# Altium PCB LKS_Motor_0313.PcbDoc (part 3 of 4)
Units mil, origin at the board's own origin, x right, y up, seen from the top; angles counter-clockwise.
Board outline 4321.51 x 591.52 mil, 2 copper layers (Top Layer, Bottom Layer); 107 components, 73 nets, 326 pads, 213 vias.
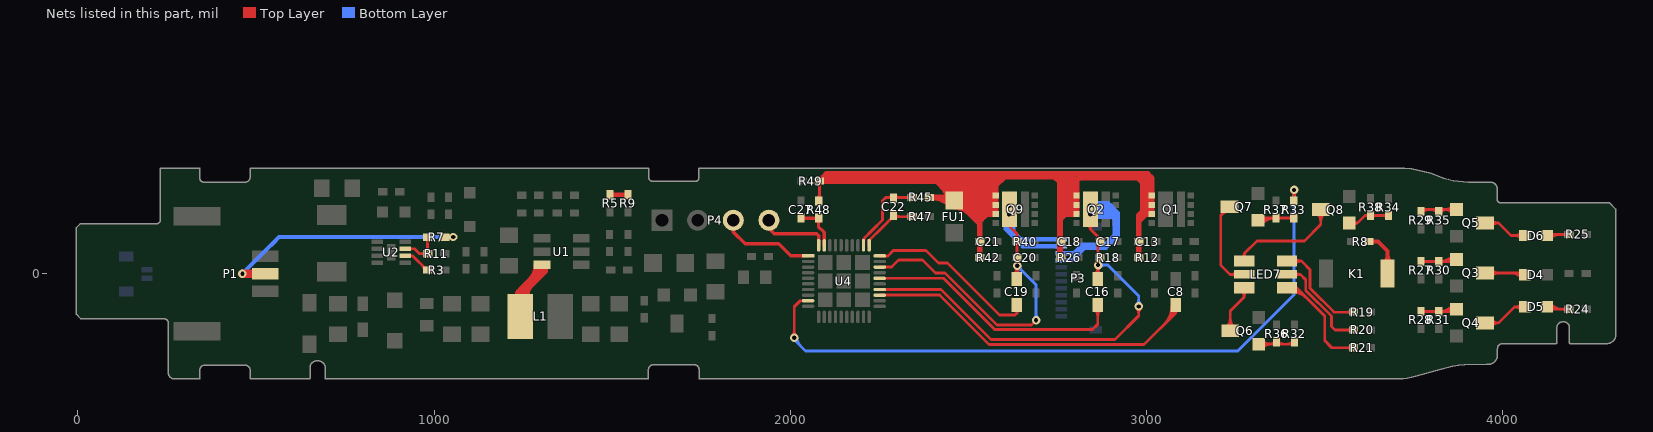
[diagram p3: the nets of this part, all layers, seen from the top]

## Via types
v1: diameter 25, hole 15, Top Layer to Bottom Layer, tented both sides, 139 vias
v2: diameter 23.62, hole 11.81, Top Layer to Bottom Layer, 74 vias

## Nets (pads, with @x,y where several pads share a name; then routed paths per layer and width w, separated by ;. In a path a pad name is that pad's centre, name@x,y a point inside that pad or via, vN(x,y) a via of type N, cw(c..) or ccw(c..) an arc to the next point about the centre after c; other vN are vias at no path point) (continued)
NetD4_2: D4.2 Q3.3 | length 352.4
  Top Layer w7.87: Q3.3@3950,2 4056.39,2 D4.2@4061.53,-3.13 ; 3990.95,2 ccw(c3990.95,-31.95) 3966.94,-7.94 cw(c3990.95,-31.95) 3990.95,2 ; 3990.95,2 cw(c3990.95,35.95) 3966.94,11.94 ccw(c3990.95,35.95) 3990.95,2 ; 4020.61,2 cw(c4020.61,-44.05) 4053.17,-11.49 ccw(c4020.61,-44.05) 4020.61,2 ; 4039.62,2 cw(c4039.62,-25.04) 4058.74,-5.92 ccw(c4039.62,-25.04) 4039.62,2 ; 4045.41,2 ccw(c4045.41,12.98) 4053.17,5.22 cw(c4045.41,12.98) 4045.41,2
NetD5_1: D5.1 R24.1 | length 236.6
  Top Layer w7.87: D5.1@4131.61,-100 R24.1@4186,-100 ; 4168.36,-100 ccw(c4168.36,-85.36) 4178.71,-95.71 cw(c4168.36,-85.36) 4168.36,-100 ; 4168.36,-100 cw(c4168.36,-114.64) 4178.71,-104.29 ccw(c4168.36,-114.64) 4168.36,-100 ; D5.1@4127.26,-90.08 ccw(c4151.2,-66.14) 4151.2,-100 cw(c4151.2,-66.14) D5.1@4127.26,-90.08 ; D5.1@4132.83,-84.51 ccw(c4170.21,-47.13) 4170.21,-100 cw(c4170.21,-47.13) D5.1@4132.83,-84.51
NetD5_2: D5.2 Q4.3 | length 312.1
  Top Layer w7.87: Q4.3@3950,-138 3988,-138 ; D5.2@4061.53,-93.13 4032.86,-93.13 3988,-138 ; 3988,-138 ccw(c3988,-165.13) 3967.58,-147.26 cw(c3988,-165.13) 3988,-138 ; 3988,-138 cw(c3988,-110.87) 3967.58,-128.74 ccw(c3988,-110.87) 3988,-138 ; 4033.01,-93.13 ccw(c4033.01,-64.62) 4053.17,-84.78 cw(c4033.01,-64.62) 4033.01,-93.13 ; 4033.01,-93.14 cw(c4033.01,-121.65) 4053.17,-101.49 ccw(c4033.01,-121.65) 4033.01,-93.14
NetD6_1: D6.1 R25.1 | length 228.6
  Top Layer w7.87: D6.1@4124.47,107.13 4127.34,110 R25.1@4186,110 ; 4168.36,110 ccw(c4168.36,124.64) 4178.71,114.29 cw(c4168.36,124.64) 4168.36,110 ; 4168.36,110 cw(c4168.36,95.36) 4178.71,105.71 ccw(c4168.36,95.36) 4168.36,110 ; D6.1@4127.26,104.35 cw(c4140.9,90.71) 4140.9,110 ccw(c4140.9,90.71) D6.1@4127.26,104.35 ; D6.1@4132.83,98.78 cw(c4159.91,71.7) 4159.91,110 ccw(c4159.91,71.7) D6.1@4132.83,98.78 ; D6.1@4132.83,115.49 ccw(c4146.07,128.73) 4146.07,110 cw(c4146.07,128.73) D6.1@4132.83,115.49
NetD6_2: D6.2 Q5.3 | length 308.1
  Top Layer w7.87: Q5.3@3950,142 3988,142 ; D6.2@4061.53,106.87 4023.14,106.87 3988,142 ; 3988,142 ccw(c3988,114.87) 3967.58,132.74 cw(c3988,114.87) 3988,142 ; 3988,142 cw(c3988,169.13) 3967.58,151.26 ccw(c3988,169.13) 3988,142 ; 4033.01,106.87 ccw(c4033.01,135.38) 4053.17,115.22 cw(c4033.01,135.38) 4033.01,106.87 ; 4033.01,106.86 cw(c4033.01,78.35) 4053.17,98.51 ccw(c4033.01,78.35) 4033.01,106.86
NetK1_1: K1.1 R8.1 | length 231.5
  Top Layer w11.81: R8.1@3624,90 3650,90 3676.61,63.39 K1.1@3676.61,0 ; 3676.61,52.95 ccw(c3709.88,52.95) 3686.36,29.43 cw(c3709.88,52.95) 3676.61,52.95 ; 3676.61,52.95 cw(c3643.35,52.95) 3666.87,29.43 ccw(c3643.35,52.95) 3676.61,52.95
NetL1_1: L1.1 U1.6 | length 1844.4
  Top Layer w11.81: 1256,-54 1256,-52 1272,-36 ; L1.1@1263,-88.78 1263,-35 ; U1.6@1294,25.72 1294,9 ; U1.6@1302.88,24.6 1302.88,4.88 1294,-4 ; U1.6@1314,23.48 1314,6 1272,-36 ; 1234,-51 ccw(c1245.7,-51) 1244.6,-62.65 cw(c1245.7,-51) 1234,-51 ; 1234,-51 cw(c1214.1,-51) 1225.14,-67.56 ccw(c1214.1,-51) 1234,-51 ; 1234,-51 1234,-112.22 L1.1@1241.78,-120 1256,-105.78 1256,-42 ; 1234,-51 1250.5,-34.5 ; 1241.78,-56.22 ccw(c1248.74,-56.22) 1247.43,-63.06 cw(c1248.74,-56.22) 1241.78,-56.22 ; 1241.78,-56.22 cw(c1234.82,-56.22) 1236.13,-63.06 ccw(c1234.82,-56.22) 1241.78,-56.22 ; 1241.78,-56.22 1256,-42 ; 1241.78,-56.22 1241.78,-110 1241.78,-43.22 ; 1241.78,-43.22 ccw(c1267.28,-43.22) 1255.57,-65.87 cw(c1267.28,-43.22) 1241.78,-43.22 ; 1241.78,-43.22 cw(c1216.28,-43.22) 1227.99,-65.87 ccw(c1216.28,-43.22) 1241.78,-43.22 ; 1241.78,-43.22 1250.5,-34.5 ; 1250.5,-34.5 1294,9 ; 1256,-54.42 ccw(c1279.88,-54.42) L1.1@1262.99,-71.31 ; 1256,-54.42 ccw(c1279.88,-54.42) L1.1@1262.99,-71.31 ; 1256,-54.42 ccw(c1279.88,-54.42) L1.1@1262.99,-71.31 ; 1256,-54.42 ccw(c1279.88,-54.42) L1.1@1262.99,-71.31 ; 1256,-54.42 ccw(c1279.88,-54.42) L1.1@1262.99,-71.31 ; 1256,-54.42 ccw(c1279.88,-54.42) L1.1@1262.99,-71.31 ; 1256,-42 cw(c1235.03,-42) 1237.81,-62.78 ccw(c1235.03,-42) 1256,-42 ; 1256,-42 1263,-35 ; 1263,-35 cw(c1235.1,-35) 1238.32,-62.72 ccw(c1235.1,-35) 1263,-35 ; 1263,-35 1272,-26 ; 1272,-36 ccw(c1295.33,-59.34) 1267.28,-76.72 cw(c1295.33,-59.34) 1272,-36 ; 1272,-36 1272,-26 ; 1272,-26 1294,-4 ; U1.6@1287.96,19.58 cw(c1281.23,8.73) 1294,8.73 ; U1.6@1287.96,19.58 cw(c1281.23,8.73) 1294,8.73 ; U1.6@1287.96,19.58 cw(c1281.23,8.73) 1294,8.73 ; U1.6@1287.96,19.58 cw(c1281.23,8.73) 1294,8.73 ; 1294,-4 1294,9 ; 1302.88,10.34 ccw(c1288.62,10.34) 1298.71,20.42 cw(c1288.62,10.34) 1302.88,10.34 ; 1302.88,10.34 cw(c1317.14,10.34) 1307.06,20.42 ccw(c1317.14,10.34) 1302.88,10.34 ; L1.1@1239.37,-74.49 ccw(c1236.84,-55.49) 1256,-55.49 cw(c1236.84,-55.49) L1.1@1239.37,-74.49 ; L1.1@1239.68,-74.45 ccw(c1236.64,-48.27) 1263,-48.27 cw(c1236.64,-48.27) L1.1@1239.68,-74.45 ; L1.1@1241.04,-86.18 ccw(c1238.18,-61.53) 1263,-61.53 cw(c1238.18,-61.53) L1.1@1241.04,-86.18 ; L1.1@1257.24,-82.94 cw(c1282.32,-67.4) 1261.46,-46.54 ccw(c1282.32,-67.4) L1.1@1257.24,-82.94 ; 1267.89,-17.11 ccw(c1226.18,24.6) 1285.17,24.6 cw(c1226.18,24.6) 1267.89,-17.11 ; U1.6@1286.9,20.42 cw(c1269.74,3.27) 1294,3.27 ccw(c1269.74,3.27) U1.6@1286.9,20.42 ; 1288.05,3.05 ccw(c1266.5,24.6) 1296.98,24.6 cw(c1266.5,24.6) 1288.05,3.05 ; U1.6@1310.52,20.42 cw(c1302.11,12.01) 1314,12.01 ccw(c1302.11,12.01) U1.6@1310.52,20.42 ; 1314,8.67 cw(c1330.62,8.67) 1318.87,20.42 ccw(c1330.62,8.67) 1314,8.67
NetLED7_1: LED7.1 Q8.3 | length 468.3
  Top Layer w7.87: LED7.1@3273.96,35.4 3273.96,55.96 ; Q8.3@3489,180 3489,138 3443,92 3310,92 3273.96,55.96 ; 3273.96,55.96 ccw(c3285.95,55.96) 3279.91,45.6 cw(c3285.95,55.96) 3273.96,55.96 ; 3273.96,55.96 cw(c3261.97,55.96) 3268.01,45.6 ccw(c3261.97,55.96) 3273.96,55.96 ; 3489,146.05 ccw(c3455.05,146.05) 3479.06,170.06 cw(c3455.05,146.05) 3489,146.05 ; 3489,146.05 cw(c3522.95,146.05) 3498.94,170.06 ccw(c3522.95,146.05) 3489,146.05
NetLED7_2: LED7.2 Q7.3 | length 369.6
  Top Layer w7.87: Q7.3@3233,188 3208,163 3208,24 3234,-2 LED7.2@3273.96,-2 ; 3238.22,-2 ccw(c3238.22,17.01) 3251.66,3.57 cw(c3238.22,17.01) 3238.22,-2 ; 3238.22,-2 cw(c3238.22,-21.01) 3251.66,-7.57 ccw(c3238.22,-21.01) 3238.22,-2 ; 3211.5,166.5 ccw(c3202.67,175.33) 3213.64,181.29 cw(c3202.67,175.33) 3211.5,166.5 ; 3213.94,168.94 cw(c3226,156.89) 3226,173.94 ccw(c3226,156.89) 3213.94,168.94
NetLED7_3: LED7.3 Q6.3 | length 324
  Top Layer w7.87: Q6.3@3235,-160 3235,-105 3273.96,-66.04 LED7.3@3273.96,-39.4 ; 3235,-126.05 ccw(c3268.95,-126.05) 3244.94,-150.06 cw(c3268.95,-126.05) 3235,-126.05 ; 3235,-126.05 cw(c3201.05,-126.05) 3225.06,-150.06 ccw(c3201.05,-126.05) 3235,-126.05 ; 3273.96,-66.04 ccw(c3249.83,-66.04) 3266.03,-48.15 cw(c3249.83,-66.04) 3273.96,-66.04 ; 3273.96,-66.04 cw(c3298.09,-66.04) 3281.89,-48.15 ccw(c3298.09,-66.04) 3273.96,-66.04
NetLED7_4: LED7.4 R21.1 | length 542.2
  Top Layer w7.87: LED7.4@3394.04,-39.4 3420.4,-39.4 3500,-119 3500,-188 3520,-208 R21.1@3580.87,-208 ; 3563.24,-208 ccw(c3563.24,-193.36) 3573.59,-203.71 cw(c3563.24,-193.36) 3563.24,-208 ; 3563.24,-208 cw(c3563.24,-222.64) 3573.59,-212.29 ccw(c3563.24,-222.64) 3563.24,-208 ; LED7.4@3406.84,-51.21 cw(c3406.84,-112.47) 3450.15,-69.15 ccw(c3406.84,-112.47) LED7.4@3406.84,-51.21 ; LED7.4@3406.84,-43.34 cw(c3406.84,-85.59) 3436.71,-55.71 ccw(c3406.84,-85.59) LED7.4@3406.84,-43.34 ; LED7.4@3406.84,-35.46 cw(c3406.84,-58.71) 3423.27,-42.27 ccw(c3406.84,-58.71) LED7.4@3406.84,-35.46
NetLED7_5: LED7.5 R20.1 | length 391.7
  Top Layer w7.87: LED7.5@3394.04,-2 3432,-2 3447,-17 3447,-47 3519,-119 3519,-148 3529,-158 R20.1@3580.87,-158 ; 3429.78,-2 ccw(c3429.78,-21.01) 3416.34,-7.57 cw(c3429.78,-21.01) 3429.78,-2 ; 3429.78,-2 cw(c3429.78,17.01) 3416.34,3.57 ccw(c3429.78,17.01) 3429.78,-2 ; 3563.24,-158 ccw(c3563.24,-143.36) 3573.59,-153.71 cw(c3563.24,-143.36) 3563.24,-158 ; 3563.24,-158 cw(c3563.24,-172.64) 3573.59,-162.29 ccw(c3563.24,-172.64) 3563.24,-158
NetLED7_6: LED7.6 R19.1 | length 408.7
  Top Layer w7.87: LED7.6@3394.04,35.4 3434.6,35.4 ; R19.1@3580.87,-108 3526,-108 3459,-41 3459,11 3434.6,35.4 ; 3434.6,35.4 ccw(c3434.6,8.68) 3415.34,27.21 cw(c3434.6,8.68) 3434.6,35.4 ; 3434.6,35.4 cw(c3434.6,62.12) 3415.34,43.59 ccw(c3434.6,62.12) 3434.6,35.4 ; 3563.24,-108 ccw(c3563.24,-93.36) 3573.59,-103.71 cw(c3563.24,-93.36) 3563.24,-108 ; 3563.24,-108 cw(c3563.24,-122.64) 3573.59,-112.29 ccw(c3563.24,-122.64) 3563.24,-108
NetP1_2: P1.2 R7.1 | length 900.1
  Top Layer w11.81: R7.1@1030,103 v2(1054,103) ; R7.1@1039.74,103 ccw(c1039.74,117.26) 1049.82,107.18 cw(c1039.74,117.26) R7.1@1039.74,103 ; R7.1@1039.74,103 cw(c1039.74,88.74) 1049.82,98.82 ccw(c1039.74,88.74) R7.1@1039.74,103 ; R7.1@1035.9,99.23 cw(c1044.99,90.13) 1044.99,103 ccw(c1044.99,90.13) R7.1@1035.9,99.23
  Top Layer w23.62: v2(462,-0.01) P1.2@525.97,-0.01
  Bottom Layer w11.81: v2(462,-0.01) 554,91.99 548.44,86.43 ; 543.36,81.35 565.01,103 v2(1054,103) ; 472.09,10.08 ccw(c482.17,-0.01) 467.91,-0.01 cw(c482.17,-0.01) 472.09,10.08 ; 472.09,10.08 cw(c462,20.16) 462,5.9 ccw(c462,20.16) 472.09,10.08 ; 1039.74,103 ccw(c1039.74,117.26) 1049.82,107.18 cw(c1039.74,117.26) 1039.74,103 ; 1039.74,103 cw(c1039.74,88.74) 1049.82,98.82 ccw(c1039.74,88.74) 1039.74,103
NetQ3_1: Q3.1 R27.1 R30.1 | length 402.7
  Top Layer w7.87: R27.1@3770,34 3864,34 Q3.1@3870,40 ; 3784.64,34 ccw(c3784.64,19.36) 3774.29,29.71 cw(c3784.64,19.36) 3784.64,34 ; 3784.64,34 cw(c3784.64,48.64) 3774.29,38.29 ccw(c3784.64,48.64) 3784.64,34 ; 3805.36,34 ccw(c3805.36,48.64) 3815.71,38.29 cw(c3805.36,48.64) 3805.36,34 ; 3805.36,34 cw(c3805.36,19.36) 3815.71,29.71 ccw(c3805.36,19.36) 3805.36,34 ; 3834.64,34 ccw(c3834.64,19.36) 3824.29,29.71 cw(c3834.64,19.36) 3834.64,34 ; 3834.64,34 cw(c3834.64,48.64) 3824.29,38.29 ccw(c3834.64,48.64) 3834.64,34 ; R30.1@3821.56,34 ccw(c3821.56,88.44) 3860.06,49.94 cw(c3821.56,88.44) R30.1@3821.56,34 ; 3840.57,34 ccw(c3840.57,69.43) 3865.62,44.38 cw(c3840.57,69.43) 3840.57,34 ; 3850.53,34 cw(c3850.53,20.53) 3860.06,30.06 ccw(c3850.53,20.53) 3850.53,34
NetQ4_1: Q4.1 R28.1 R31.1 | length 402.7
  Top Layer w7.87: R28.1@3770,-106 3864,-106 Q4.1@3870,-100 ; 3784.64,-106 ccw(c3784.64,-120.64) 3774.29,-110.29 cw(c3784.64,-120.64) 3784.64,-106 ; 3784.64,-106 cw(c3784.64,-91.36) 3774.29,-101.71 ccw(c3784.64,-91.36) 3784.64,-106 ; 3805.36,-106 ccw(c3805.36,-91.36) 3815.71,-101.71 cw(c3805.36,-91.36) 3805.36,-106 ; 3805.36,-106 cw(c3805.36,-120.64) 3815.71,-110.29 ccw(c3805.36,-120.64) 3805.36,-106 ; 3834.64,-106 ccw(c3834.64,-120.64) 3824.29,-110.29 cw(c3834.64,-120.64) 3834.64,-106 ; 3834.64,-106 cw(c3834.64,-91.36) 3824.29,-101.71 ccw(c3834.64,-91.36) 3834.64,-106 ; R31.1@3821.56,-106 ccw(c3821.56,-51.56) 3860.06,-90.06 cw(c3821.56,-51.56) R31.1@3821.56,-106 ; 3840.57,-106 ccw(c3840.57,-70.57) 3865.62,-95.62 cw(c3840.57,-70.57) 3840.57,-106 ; 3850.53,-106 cw(c3850.53,-119.47) 3860.06,-109.94 ccw(c3850.53,-119.47) 3850.53,-106
NetQ5_1: Q5.1 R29.1 R35.1 | length 317.9
  Top Layer w7.87: R29.1@3776,180 Q5.1@3870,180 ; 3836.05,180 ccw(c3836.05,213.95) 3860.06,189.94 cw(c3836.05,213.95) 3836.05,180 ; 3836.05,180 cw(c3836.05,146.05) 3860.06,170.06 ccw(c3836.05,146.05) 3836.05,180 ; R29.1@3774.29,172.71 cw(c3791.88,155.12) 3791.88,180 ccw(c3791.88,155.12) R29.1@3774.29,172.71 ; 3798.12,180 cw(c3798.12,155.12) 3815.71,172.71 ccw(c3798.12,155.12) 3798.12,180 ; R35.1@3824.29,172.71 cw(c3841.88,155.12) 3841.88,180 ccw(c3841.88,155.12) R35.1@3824.29,172.71
NetQ6_1: Q6.1 R32.1 R36.1 | length 326.4
  Top Layer w7.87: Q6.1@3315,-198 3409,-198 R32.1@3415,-192 ; 3348.95,-198 ccw(c3348.95,-231.95) 3324.94,-207.94 cw(c3348.95,-231.95) 3348.95,-198 ; 3348.95,-198 cw(c3348.95,-164.05) 3324.94,-188.06 ccw(c3348.95,-164.05) 3348.95,-198 ; 3343.12,-198 ccw(c3343.12,-173.12) 3360.71,-190.71 cw(c3343.12,-173.12) 3343.12,-198 ; R36.1@3369.29,-190.71 ccw(c3386.88,-173.12) 3386.88,-198 cw(c3386.88,-173.12) R36.1@3369.29,-190.71 ; 3393.12,-198 ccw(c3393.12,-173.12) 3410.71,-190.71 cw(c3393.12,-173.12) 3393.12,-198
NetQ7_1: Q7.1 R33.1 R37.1 | length 402.7
  Top Layer w7.87: Q7.1@3313,150 3319,156 R33.1@3413,156 ; 3348.36,156 ccw(c3348.36,170.64) 3358.71,160.29 cw(c3348.36,170.64) 3348.36,156 ; 3348.36,156 cw(c3348.36,141.36) 3358.71,151.71 ccw(c3348.36,141.36) 3348.36,156 ; 3377.64,156 ccw(c3377.64,141.36) 3367.29,151.71 cw(c3377.64,141.36) 3377.64,156 ; 3377.64,156 cw(c3377.64,170.64) 3367.29,160.29 ccw(c3377.64,170.64) 3377.64,156 ; 3398.36,156 ccw(c3398.36,170.64) 3408.71,160.29 cw(c3398.36,170.64) 3398.36,156 ; 3398.36,156 cw(c3398.36,141.36) 3408.71,151.71 ccw(c3398.36,141.36) 3398.36,156 ; Q7.1@3317.38,145.62 cw(c3342.43,120.57) 3342.43,156 ccw(c3342.43,120.57) Q7.1@3317.38,145.62 ; Q7.1@3322.94,140.06 cw(c3361.44,101.56) 3361.44,156 ccw(c3361.44,101.56) Q7.1@3322.94,140.06 ; Q7.1@3322.94,159.94 ccw(c3332.47,169.47) 3332.47,156 cw(c3332.47,169.47) Q7.1@3322.94,159.94
NetQ8_1: Q8.1 R34.1 R38.1 | length 308.4
  Top Layer w7.87: Q8.1@3569,142 3592,142 ; R34.1@3679,163 3613,163 3592,142 ; 3592,142 ccw(c3592,130.22) 3581.52,135.59 cw(c3592,130.22) 3592,142 ; 3592,142 cw(c3592,153.78) 3581.52,148.41 ccw(c3592,153.78) 3592,142 ; 3614.36,163 ccw(c3614.36,177.64) 3624.71,167.29 cw(c3614.36,177.64) 3614.36,163 ; 3614.36,163 cw(c3614.36,148.36) 3624.71,158.71 ccw(c3614.36,148.36) 3614.36,163 ; 3643.64,163 ccw(c3643.64,148.36) 3633.29,158.71 cw(c3643.64,148.36) 3643.64,163 ; 3643.64,163 cw(c3643.64,177.64) 3633.29,167.29 ccw(c3643.64,177.64) 3643.64,163 ; 3664.36,163 ccw(c3664.36,177.64) 3674.71,167.29 cw(c3664.36,177.64) 3664.36,163 ; 3664.36,163 cw(c3664.36,148.36) 3674.71,158.71 ccw(c3664.36,148.36) 3664.36,163
NetR3_1: R3.1 U2.6 | length 123.2
  Top Layer w7.87: U2.6@919.37,50.16 939.84,50.16 R3.1@980,10 ; 967.94,22.06 cw(c955.88,10) 972.94,10 ccw(c955.88,10) 967.94,22.06 ; R3.1@970.36,19.64 ccw(c979,28.29) 979,16.06 cw(c979,28.29) R3.1@970.36,19.64
NetR5_2: R5.2 R9.1 | length 50
  Top Layer w11.81: R5.2@1494,221.56 R9.1@1544,221.56
NetR7_2: R7.2 R11.1 U2.7 | length 248.4
  Top Layer w7.87: U2.7@919.37,69.84 945.16,69.84 955,60 958.94,56.06 R11.1@982,56.06 ; R11.1@982,60 R7.2@982,102.13 ; 964.36,56.06 ccw(c964.36,70.7) 974.71,60.35 cw(c964.36,70.7) 964.36,56.06 ; 964.36,56.06 cw(c964.36,41.43) 974.71,51.78 ccw(c964.36,41.43) 964.36,56.06 ; 982,70.7 ccw(c996.64,70.7) 986.29,60.35 cw(c996.64,70.7) 982,70.7 ; 982,70.7 cw(c967.36,70.7) 977.71,60.35 ccw(c967.36,70.7) 982,70.7 ; 982,87.49 ccw(c967.36,87.49) 977.71,97.84 cw(c967.36,87.49) 982,87.49 ; 982,87.49 cw(c996.64,87.49) 986.29,97.84 ccw(c996.64,87.49) 982,87.49
OC: C27.2 R48.2 U4.39 | length 253.3
  Top Layer w9.45: C27.2@2030,156 R48.2@2080,156 ; R48.2@2079,156 2079,132 2095.28,115.72 2095.28,103 U4.39@2095.28,79.53 ; 2042.74,156 ccw(c2042.74,143.26) 2033.73,152.27 cw(c2042.74,143.26) 2042.74,156 ; 2042.74,156 cw(c2042.74,168.74) 2033.73,159.73 ccw(c2042.74,168.74) 2042.74,156 ; 2067.26,156 ccw(c2067.26,168.74) 2076.27,159.73 cw(c2067.26,168.74) 2067.26,156 ; 2067.26,156 cw(c2067.26,143.26) 2076.27,152.27 ccw(c2067.26,143.26) 2067.26,156 ; R48.2@2076.27,149.27 cw(c2069.68,142.68) 2079,142.68 ccw(c2069.68,142.68) R48.2@2076.27,149.27 ; 2079,137.85 cw(c2095.15,137.85) 2083.73,149.27 ccw(c2095.15,137.85) 2079,137.85
OPA0_IN: C22.1 R47.2 U4.31 | length 323.2
  Top Layer w7.87: U4.31@2221.26,79.53 2221.26,93.26 2258.5,130.5 ; 2270,142 2258.5,130.5 ; C22.1@2290,160 R47.2@2346,160 ; C22.1@2290,164.03 2290,162 2258.5,130.5 ; 2324.43,160 ccw(c2324.43,174.64) 2334.78,164.29 cw(c2324.43,174.64) 2324.43,160 ; 2324.43,160 cw(c2324.43,145.36) 2334.78,155.71 ccw(c2324.43,145.36) 2324.43,160 ; 2278,150 cw(c2290,137.99) 2290,154.97 ccw(c2290,137.99) 2278,150 ; C22.1@2280.33,152.33 ccw(c2271.64,161.03) 2283.94,161.03 cw(c2271.64,161.03) C22.1@2280.33,152.33 ; C22.1@2294.29,156.74 cw(c2302.15,148.88) 2302.15,160 ccw(c2302.15,148.88) C22.1@2294.29,156.74 ; C22.1@2294.29,165.32 ccw(c2307.13,178.16) 2307.13,160 cw(c2307.13,178.16) C22.1@2294.29,165.32
OPA0_IP: C22.2 R45.2 U4.32 | length 416.6
  Top Layer w7.87: U4.32@2205.51,79.53 2205.51,97.51 2230,122 ; 2238,130 2230,122 ; 2264,210 2259,205 ; R45.2@2346,213.94 2267.94,213.94 2259,205 ; 2230,122 2259,151 2259,205 ; 2324.43,213.94 ccw(c2324.43,228.57) 2334.78,218.22 cw(c2324.43,228.57) 2324.43,213.94 ; 2324.43,213.94 cw(c2324.43,199.3) 2334.78,209.65 ccw(c2324.43,199.3) 2324.43,213.94 ; U4.32@2206.3,92.52 cw(c2220.25,92.52) 2210.39,102.39 ccw(c2220.25,92.52) U4.32@2206.3,92.52 ; 2272.72,213.94 ccw(c2272.72,232.31) 2285.71,219.32 cw(c2272.72,232.31) 2272.72,213.94 ; 2278.01,213.94 cw(c2278.01,203.04) 2285.71,210.74 ccw(c2278.01,203.04) 2278.01,213.94 ; C22.2@2294.29,210.74 cw(c2301.99,203.04) 2301.99,213.94 ccw(c2301.99,203.04) C22.2@2294.29,210.74 ; C22.2@2294.29,219.32 ccw(c2307.28,232.31) 2307.28,213.94 cw(c2307.28,232.31) C22.2@2294.29,219.32
PGND: C13.1 C18.1 C21.1 FU1.2 Q1.5 Q1.6 Q1.7 Q2.5 Q2.6 Q2.7 Q9.5 Q9.6 Q9.7 R12.2 R26.2 R42.2 R45.1 R48.1 R49.1 | length 8530
  Top Layer w7.87: R48.1@2081.56,205.56 R49.1@2081.56,260 ; 2081.56,245.36 ccw(c2066.92,245.36) 2077.27,255.71 cw(c2066.92,245.36) 2081.56,245.36 ; 2081.56,245.36 cw(c2096.2,245.36) 2085.85,255.71 ccw(c2096.2,245.36) 2081.56,245.36 ; R48.1@2075.71,211.29 ccw(c2061.6,225.4) 2081.56,225.4 cw(c2061.6,225.4) R48.1@2075.71,211.29 ; 2081.56,217.87 ccw(c2090.87,217.87) 2084.29,211.29 cw(c2090.87,217.87) 2081.56,217.87
  Top Layer w15.75: R48.1@2080,204 R48.1@2081.56,205.56 ; 2336,268 2336,272 ; 2361,260 2330,260 ; R45.1@2390.06,213.94 FU1.2@2481.06,213.94 ; 2436,246 2438.5,243.5 ; 2451.06,230.94 FU1.2@2460,222 ; FU1.2@2460,213.94 FU1.2@2460,222 ; 2467.57,260.58 2576.42,260.58 ; FU1.2@2481.06,212.94 2532,162 ; 2493,272 2486.92,265.92 2486.92,249.92 ; 2515,190.93 2516.07,190.93 2545.5,161.5 ; 2531.44,205.4 2533.04,207 2576.42,207 ; R42.2@2532,45 2532,140 ; 2532,163 2532,148 ; 2532,188 2448,272 ; 2536.3,183.01 2517.99,183.01 2460,241 ; 2565,167.65 2563,169.65 2563,193.24 ; 2565,272 2576.42,260.58 ; Q9.6@2576.42,193.24 2563,193.24 ; Q9.5@2576.42,218.83 2501.17,218.83 2497.78,222.22 2509.57,234 2576.42,234 ; 2587.83,272 2576.42,260.58 ; 2609,272 2600.42,272 2576.42,248 ; 2757,163 2761.65,167.65 2773,167.65 ; 2757,167.65 2767,177.65 2767,266 ; 2757,186 2764.24,193.24 Q2.6@2803.42,193.24 ; 2757,217 2758.83,218.83 Q2.5@2803.42,218.83 ; R26.2@2759,45 2757,47 2757,146 ; 2777,271 2789,259 2789,167.65 ; 2788,176 2788,259 ; 2788,280 2788,275 2803.42,259.58 2803.42,250 ; 2822,280 2811,269 ; 2972,269 2811,269 ; 2972,273 2989,256 ; R12.2@2977.87,45 2977.87,146.87 ; 2980,269 2989,260 2989,252 2989,174 2977.87,162.87 2977.87,146.87 ; 2990,269 2998.65,260.35 2998.65,167.65 ; 3014.42,238 3003,249.42 3003,280 ; 2102,260 2330,260 ; 2102,260 2114,272 ; 2102,260 R49.1@2081.56,260 2101.56,280 2199,280 ; 2114,272 cw(c2089.4,296.6) 2084.84,262.11 ccw(c2089.4,296.6) 2114,272 ; 2114,272 2429,272 ; 2114,272 2122,280 2199,280 ; 2199,280 2739,280 ; 2330,260 2397,260 ; 2397,260 2422,260 FU1.2@2460,222 ; 2397,260 2410,260 2460,210 FU1.2@2460,205 ; 2429,272 2448,272 ; 2429,272 2460,241 ; FU1.2@2442.87,205 ccw(c2360.49,205) 2418.74,263.26 cw(c2360.49,205) FU1.2@2442.87,205 ; FU1.2@2442.87,205 ccw(c2389.46,205) 2427.23,242.77 cw(c2389.46,205) FU1.2@2442.87,205 ; 2448,272 2742,272 2757,257 2757,146 ; 2448,272 2464.83,272 2486.92,249.92 ; FU1.2@2460,205 2467,205 2532,140 ; FU1.2@2460,205 2460,241 ; 2460,241 ccw(c2489.27,241) 2470.8,218.29 cw(c2489.27,241) 2460,241 ; 2460,241 cw(c2430.73,241) 2449.2,218.29 ccw(c2430.73,241) 2460,241 ; 2486.92,249.92 2488.83,248 2576.42,248 ; 2486.92,249.92 2551.65,185.18 2551.65,167.65 ; 2532,140 2532,148 ; 2532,148 2545.5,161.5 ; 2545.5,161.5 2551.65,167.65 ; 2551.65,167.65 2528.38,190.93 2503.07,190.93 2505.39,193.24 2563,193.24 ; 2551.65,167.65 Q9.7@2576.42,167.65 2576.42,207 ; 2563,193.24 ccw(c2593.32,193.24) 2576.27,168.17 cw(c2593.32,193.24) 2563,193.24 ; 2576.42,207 2576.42,234 ; 2576.42,234 2576.42,248 ; 2576.42,248 2576.42,260.58 ; 2739,280 2753,280 2767,266 ; 2739,280 3003,280 ; 2757,146 2757,151.65 2773,167.65 ; 2767,266 2773,260 2773,167.65 ; 2773,167.65 2789,167.65 ; 2789,167.65 Q2.7@2803.42,167.65 2803.42,250 ; Q2.7@2803.36,168.1 cw(c2840.44,205.18) 2788,205.18 ccw(c2840.44,205.18) Q2.7@2803.36,168.1 ; Q2.7@2803.36,168.1 cw(c2838.03,202.76) 2789,202.76 ccw(c2838.03,202.76) Q2.7@2803.36,168.1 ; Q2.6@2803.36,193.69 cw(c2840.44,230.77) 2788,230.77 ccw(c2840.44,230.77) Q2.6@2803.36,193.69 ; Q2.6@2803.36,193.69 cw(c2838.03,228.35) 2789,228.35 ccw(c2838.03,228.35) Q2.6@2803.36,193.69 ; Q2.5@2803.36,218.39 ccw(c2840.44,181.31) 2788,181.31 cw(c2840.44,181.31) Q2.5@2803.36,218.39 ; Q2.5@2803.36,218.39 ccw(c2838.03,183.72) 2789,183.72 cw(c2838.03,183.72) Q2.5@2803.36,218.39 ; Q2.5@2803.36,219.28 cw(c2840.44,256.36) 2788,256.36 ccw(c2840.44,256.36) Q2.5@2803.36,219.28 ; Q2.5@2803.36,219.28 cw(c2838.03,253.94) 2789,253.94 ccw(c2838.03,253.94) Q2.5@2803.36,219.28 ; 2803.42,250 2803.42,261.42 2811,269 ; 2977.87,146.87 2998.65,167.65 ; 2998.65,167.65 Q1.7@3014.42,167.65 3014.42,268.58 3003,280 ; R49.1@2086.69,260 cw(c2099.06,260) 2090.31,268.75 ccw(c2099.06,260) R49.1@2086.69,260 ; R45.1@2397.08,213.94 cw(c2397.08,142.08) 2447.89,192.89 ccw(c2397.08,142.08) R45.1@2397.08,213.94 ; FU1.2@2435.1,213.94 cw(c2435.1,180.1) 2459.03,204.03 ccw(c2435.1,180.1) FU1.2@2435.1,213.94 ; 2439.3,230.7 ccw(c2460,251.4) 2460,222.13 cw(c2460,251.4) 2439.3,230.7 ; 2445.63,236.37 cw(c2414.25,205) 2458.62,205 ccw(c2414.25,205) 2445.63,236.37 ; FU1.2@2456.86,219.02 cw(c2471.54,153.51) 2519.02,200.98 ccw(c2471.54,153.51) FU1.2@2456.86,219.02 ; FU1.2@2457.53,219.16 cw(c2464.48,179.28) 2493.1,207.9 ccw(c2464.48,179.28) FU1.2@2457.53,219.16 ; 2458.17,261.83 cw(c2414.54,218.19) 2473.8,200.99 ccw(c2414.54,218.19) 2458.17,261.83 ; FU1.2@2460,187.87 cw(c2460,129.63) 2501.19,170.81 ccw(c2460,129.63) FU1.2@2460,187.87 ; FU1.2@2460,203.62 cw(c2460,130.28) 2511.86,182.14 ccw(c2460,130.28) FU1.2@2460,203.62 ; FU1.2@2460,219.37 cw(c2460,184.05) 2484.97,209.03 ccw(c2460,184.05) FU1.2@2460,219.37 ; FU1.2@2460.24,203.64 cw(c2470.84,142.75) 2514.54,186.46 ccw(c2470.84,142.75) FU1.2@2460.24,203.64 ; FU1.2@2477.13,205 ccw(c2501.57,205) 2484.29,187.71 cw(c2501.57,205) FU1.2@2477.13,205 ; 2537.79,234 cw(c2537.79,180.71) 2575.47,218.39 ccw(c2537.79,180.71) 2537.79,234 ; 2541.2,207 cw(c2541.2,158.52) 2575.47,192.8 ccw(c2541.2,158.52) 2541.2,207 ; 2545.83,207 ccw(c2545.83,248.92) 2575.47,219.28 cw(c2545.83,248.92) 2545.83,207 ; 2788,170.44 cw(c2811.87,170.44) 2803.15,192.66 ccw(c2811.87,170.44) 2788,170.44 ; 2998.65,180.47 cw(c3052.28,180.47) 3014.36,218.39 ccw(c3052.28,180.47) 2998.65,180.47 ; 2998.65,206.01 ccw(c3052.28,206.01) 3014.36,168.1 cw(c3052.28,206.01) 2998.65,206.01 ; 2998.65,231.6 ccw(c3052.28,231.6) 3014.36,193.69 cw(c3052.28,231.6) 2998.65,231.6 ; 2998.65,257.19 ccw(c3052.28,257.19) 3014.36,219.28 cw(c3052.28,257.19) 2998.65,257.19
RED: R33.2 U4.9 | length 2219.1
  Top Layer w7.87: v2(2011,-180) 2011,-93 2028.02,-75.98 U4.9@2050,-75.98 ; R33.2@3413,204 3414,205 v2(3414,235) ; 2011,-160.99 ccw(c2030.01,-160.99) 2016.57,-174.43 cw(c2030.01,-160.99) 2011,-160.99 ; 2011,-160.99 cw(c1991.99,-160.99) 2005.43,-174.43 ccw(c1991.99,-160.99) 2011,-160.99 ; R33.2@3414,215.99 ccw(c3394.99,215.99) 3408.43,229.43 cw(c3394.99,215.99) R33.2@3414,215.99 ; R33.2@3414,215.99 cw(c3433.01,215.99) 3419.57,229.43 ccw(c3433.01,215.99) R33.2@3414,215.99 ; R33.2@3408.71,211.29 ccw(c3395.95,224.05) 3414,224.05 cw(c3395.95,224.05) R33.2@3408.71,211.29 ; 3414,219.22 ccw(c3425.22,219.22) 3417.29,211.29 cw(c3425.22,219.22) 3414,219.22
  Bottom Layer w7.87: v2(2011,-180) 2011,-185 2043,-217 3256,-217 3414,-59 v2(3414,235) ; 3414,215.99 ccw(c3394.99,215.99) 3408.43,229.43 cw(c3394.99,215.99) 3414,215.99 ; 3414,215.99 cw(c3433.01,215.99) 3419.57,229.43 ccw(c3433.01,215.99) 3414,215.99 ; v2@2018.87,-180 ccw(c2049.95,-180) 2027.98,-201.98 cw(c2049.95,-180) v2@2018.87,-180
SWCLK: P4.4 U4.40 | length 208
  Top Layer w9.45: P4.4@1940,160 1940,128 1940,127 1955,112 2074,112 2079.53,106.47 U4.40@2079.53,79.53
SWDIO: P4.3 U4.1 | length 280.8
  Top Layer w9.45: P4.3@1840,160 1840,117 1873,84 1967,84 2001,50 U4.1@2050,50
U: C19.1 C20.1 P3.1 P3.2 Q9.10 R40.2 U4.28 | length 3228.4
  Top Layer w7.87: U4.28@2250.79,18.5 2284.5,18.5 2304,38 2371,38 2407.5,1.5 2434.5,1.5 2580,-144 2677,-144 v2(2690,-131) ; C19.1@2636.06,-14.76 R40.2@2636,90 2636.06,111.94 2615.17,132.83 Q9.10@2615.17,183.33 ; Q9.10@2615.17,183.33 cw(c2601.91,183.33) 2609.49,172.46 ccw(c2601.91,183.33) Q9.10@2615.17,183.33 ; v2@2636.06,16.95 ccw(c2662.77,16.95) 2643.89,-1.93 cw(c2662.77,16.95) v2@2636.06,16.95 ; v2@2636.06,16.95 cw(c2609.35,16.95) 2628.24,-1.93 ccw(c2609.35,16.95) v2@2636.06,16.95 ; Q9.10@2608.43,160.43 cw(c2592.17,144.17) 2615.17,144.17 ccw(c2592.17,144.17) Q9.10@2608.43,160.43 ; Q9.10@2608.43,184.43 cw(c2592.17,168.17) 2615.17,168.17 ccw(c2592.17,168.17) Q9.10@2608.43,184.43 ; Q9.10@2615.17,149.81 cw(c2630.19,149.81) 2619.57,160.43 ccw(c2630.19,149.81) Q9.10@2615.17,149.81 ; Q9.10@2615.17,173.81 cw(c2630.19,173.81) 2619.57,184.43 ccw(c2630.19,173.81) Q9.10@2615.17,173.81 ; Q9.10@2615.17,182.19 ccw(c2630.19,182.19) 2619.57,171.57 cw(c2630.19,182.19) Q9.10@2615.17,182.19 ; v2@2631.43,16.43 cw(c2620.25,5.25) 2636.06,5.25 ccw(c2620.25,5.25) v2@2631.43,16.43 ; v2@2631.43,27.57 ccw(c2620.25,38.75) 2636.06,38.75 cw(c2620.25,38.75) v2@2631.43,27.57 ; C20.1@2631.71,40.71 cw(c2621.21,30.21) 2636.06,30.21 ccw(c2621.21,30.21) C20.1@2631.71,40.71 ; C20.1@2631.71,49.29 ccw(c2621.21,59.79) 2636.06,59.79 cw(c2621.21,59.79) C20.1@2631.71,49.29 ; R40.2@2631.71,85.71 cw(c2621.21,75.21) 2636.06,75.21 ccw(c2621.21,75.21) R40.2@2631.71,85.71 ; R40.2@2631.71,94.29 ccw(c2621.21,104.79) 2636.06,104.79 cw(c2621.21,104.79) R40.2@2631.71,94.29 ; C19.1@2636.06,0.73 cw(c2658.27,0.73) 2642.57,16.43 ccw(c2658.27,0.73) C19.1@2636.06,0.73 ; v2@2636.06,30.52 cw(c2650.48,30.52) 2640.29,40.71 ccw(c2650.48,30.52) v2@2636.06,30.52 ; C20.1@2636.06,43.27 ccw(c2658.27,43.27) 2642.57,27.57 cw(c2658.27,43.27) C20.1@2636.06,43.27 ; 2636.06,59.49 ccw(c2650.48,59.49) 2640.29,49.29 cw(c2650.48,59.49) 2636.06,59.49 ; 2636.06,75.51 cw(c2650.48,75.51) 2640.29,85.71 ccw(c2650.48,75.51) 2636.06,75.51 ; 2636.06,104.49 ccw(c2650.48,104.49) 2640.29,94.29 cw(c2650.48,104.49) 2636.06,104.49
  Bottom Layer w7.87: v2(2637,22) 2690,-31 v2(2690,-131) ; 2650.44,8.56 ccw(c2637,-4.88) 2637,14.13 cw(c2637,-4.88) 2650.44,8.56 ; 2650.44,8.56 cw(c2663.88,22) 2644.87,22 ccw(c2663.88,22) 2650.44,8.56 ; 2690,-111.99 ccw(c2709.01,-111.99) 2695.57,-125.43 cw(c2709.01,-111.99) 2690,-111.99 ; 2690,-111.99 cw(c2670.99,-111.99) 2684.43,-125.43 ccw(c2670.99,-111.99) 2690,-111.99
  Bottom Layer w11.81: v2(2614,190) 2614,128 2645.47,96.53 ; v2@2618,198 2618,124 2625.67,116.33 ; 2632.68,109.32 2626,116 2626,198 ; 2667,76.85 2665.15,76.85 2645.47,96.53 ; P3.2@2760,76.85 2652.15,76.85 2604,125 2604,198 ; P3.1@2760,96.53 2645.47,96.53 ; 2604,198 ccw(c2638.23,198) 2617.57,170.71 cw(c2638.23,198) 2604,198 ; 2604,198 2626,198 ; v2@2609.82,161.82 cw(c2599.74,151.74) 2614,151.74 ; v2@2609.82,161.82 cw(c2570.77,122.77) 2626,122.77 ccw(c2570.77,122.77) v2@2609.82,161.82 ; v2@2609.82,161.82 cw(c2590.09,142.09) 2618,142.09 ccw(c2590.09,142.09) v2@2609.82,161.82 ; v2@2609.82,161.82 cw(c2599.74,151.74) 2614,151.74 ; v2@2609.82,170.18 ccw(c2599.74,180.26) v2@2614,180.26 ; v2@2609.82,170.18 ccw(c2590.09,189.91) 2618,189.91 cw(c2590.09,189.91) v2@2609.82,170.18 ; v2@2609.82,170.18 ccw(c2623.89,156.12) 2604,156.12 cw(c2623.89,156.12) v2@2609.82,170.18 ; v2@2609.82,170.18 ccw(c2599.74,180.26) v2@2614,180.26 ; v2@2609.82,185.82 cw(c2599.74,175.74) v2@2614,175.74 ; v2@2609.82,185.82 cw(c2570.77,146.77) 2626,146.77 ccw(c2570.77,146.77) v2@2609.82,185.82 ; v2@2609.82,185.82 cw(c2590.09,166.09) 2618,166.09 ccw(c2590.09,166.09) v2@2609.82,185.82 ; v2@2609.82,185.82 cw(c2599.74,175.74) v2@2614,175.74 ; 2614,151.74 cw(c2628.26,151.74) v2@2618.18,161.82 ; 2614,151.74 cw(c2628.26,151.74) v2@2618.18,161.82 ; v2@2614,175.74 cw(c2628.26,175.74) v2@2618.18,185.82 ; v2@2614,175.74 cw(c2628.26,175.74) v2@2618.18,185.82 ; v2@2614,180.26 ccw(c2628.26,180.26) v2@2618.18,170.18 ; v2@2614,180.26 ccw(c2628.26,180.26) v2@2618.18,170.18 ; v2@2618.18,161.82 ccw(c2652.4,127.6) 2604,127.6 cw(c2652.4,127.6) v2@2618.18,161.82 ; v2@2618.18,170.18 cw(c2599.29,151.29) 2626,151.29 ccw(c2599.29,151.29) v2@2618.18,170.18 ; v2@2618.18,185.82 ccw(c2652.4,151.6) 2604,151.6 cw(c2652.4,151.6) v2@2618.18,185.82 ; 2626,198 cw(c2594.36,198) 2610.91,171.03 ccw(c2594.36,198) 2626,198 ; 2604,174.24 ccw(c2620.24,174.24) 2610.43,161.29 cw(c2620.24,174.24) 2604,174.24 ; 2604,180.12 cw(c2623.89,180.12) 2609.82,194.18 ccw(c2623.89,180.12) 2604,180.12 ; v2@2617.09,160.97 ccw(c2607.32,176.89) 2626,176.89 cw(c2607.32,176.89) v2@2617.09,160.97 ; v2@2618.18,194.18 cw(c2599.29,175.29) 2626,175.29 ccw(c2599.29,175.29) v2@2618.18,194.18 ; 2623.27,150.9 ccw(c2620.27,155.78) 2626,155.78 cw(c2620.27,155.78) 2623.27,150.9
  other v2: 2614,166
V: C16.1 C17.1 P3.3 P3.4 Q2.10 R18.2 U4.24 | length 3849.4
  Top Layer w7.87: U4.24@2250.79,-44.49 2422.49,-44.49 2563,-185 2911,-185 2978,-118 v2(2978,-92) ; Q2.10@2842.17,181.33 2842.17,124.83 ; C16.1@2863,-14.76 2863,90 2863,104 ; 2842.17,124.83 ccw(c2830.02,124.83) 2835.07,135.88 cw(c2830.02,124.83) 2842.17,124.83 ; 2842.17,124.83 cw(c2854.31,124.83) 2849.26,135.88 ccw(c2854.31,124.83) 2842.17,124.83 ; 2842.17,124.83 2863,104 ; v2@2863,16.95 ccw(c2889.71,16.95) 2870.82,-1.93 cw(c2889.71,16.95) v2@2863,16.95 ; v2@2863,16.95 cw(c2836.29,16.95) 2855.18,-1.93 ccw(c2836.29,16.95) v2@2863,16.95 ; 2863,104 ccw(c2872.28,104) 2868.48,95.53 cw(c2872.28,104) 2863,104 ; 2978,-111.01 ccw(c2958.99,-111.01) 2972.43,-97.57 cw(c2958.99,-111.01) 2978,-111.01 ; 2978,-111.01 cw(c2997.01,-111.01) 2983.57,-97.57 ccw(c2997.01,-111.01) 2978,-111.01 ; Q2.10@2836.43,161.43 cw(c2822.59,147.59) 2842.17,147.59 ccw(c2822.59,147.59) Q2.10@2836.43,161.43 ; Q2.10@2836.43,185.43 cw(c2822.59,171.59) 2842.17,171.59 ccw(c2822.59,171.59) Q2.10@2836.43,185.43 ; Q2.10@2842.17,148.39 cw(c2860.61,148.39) 2847.57,161.43 ccw(c2860.61,148.39) Q2.10@2842.17,148.39 ; Q2.10@2842.17,172.39 cw(c2860.61,172.39) 2847.57,185.43 ccw(c2860.61,172.39) Q2.10@2842.17,172.39 ; v2@2858.43,18.43 cw(c2847.4,7.4) 2863,7.4 ccw(c2847.4,7.4) v2@2858.43,18.43 ; v2@2858.43,29.57 ccw(c2847.4,40.6) 2863,40.6 cw(c2847.4,40.6) v2@2858.43,29.57 ; C16.1@2863,2.58 cw(c2885.42,2.58) 2869.57,18.43 ccw(c2885.42,2.58) C16.1@2863,2.58 ; v2@2863,23.12 cw(c2887.88,23.12) 2870.29,40.71 ccw(c2887.88,23.12) v2@2863,23.12 ; R18.2@2863,45.42 ccw(c2885.42,45.42) 2869.57,29.57 cw(c2885.42,45.42) R18.2@2863,45.42 ; 2863,66.88 ccw(c2887.88,66.88) 2870.29,49.29 cw(c2887.88,66.88) 2863,66.88 ; 2863,68.12 cw(c2887.88,68.12) 2870.29,85.71 ccw(c2887.88,68.12) 2863,68.12
  Bottom Layer w7.87: v2(2864,24) 2891,24 2978,-63 v2(2978,-92) ; 2883.01,24 ccw(c2883.01,4.99) 2869.57,18.43 cw(c2883.01,4.99) 2883.01,24 ; 2883.01,24 cw(c2883.01,43.01) 2869.57,29.57 ccw(c2883.01,43.01) 2883.01,24 ; 2978,-72.99 ccw(c2997.01,-72.99) 2983.57,-86.43 cw(c2997.01,-72.99) 2978,-72.99 ; 2978,-72.99 cw(c2958.99,-72.99) 2972.43,-86.43 ccw(c2958.99,-72.99) 2978,-72.99
  Bottom Layer w11.81: P3.4@2760,37.48 2791.48,37.48 2827,73 2886,73 2920,107 2920,132 ; P3.3@2760,57.17 2795.17,57.17 2820,82 2883,82 2911,110 2911,151 2903,159 ; v2@2835,175 2838,178 2897,178 ; v2@2835,187 2888,187 2897,178 ; v2(2842,167) 2895,167 2920,142 2920,132 ; v2(2842,191) 2842,195 2845,198 2892,198 ; v2@2834,198 ccw(c2869.6,198) 2845.93,171.41 cw(c2869.6,198) v2@2834,198 ; v2@2834,198 2834,165 2835,164 v2@2840,159 ; v2@2834,198 2892,198 ; v2@2837.82,186.82 cw(c2810.84,159.84) 2849,159.84 ccw(c2810.84,159.84) v2@2837.82,186.82 ; v2@2837.82,186.82 ccw(c2859.13,208.13) 2859.13,178 cw(c2859.13,208.13) v2@2837.82,186.82 ; v2@2840,159 v2@2849,159 ; v2@2840,159 v2@2849,159 ; v2@2840,159 2903,159 ; v2@2846.18,162.82 cw(c2882.81,126.19) 2882.81,178 ccw(c2882.81,126.19) v2@2846.18,162.82 ; v2@2846.18,162.82 cw(c2856.26,152.74) 2856.26,167 ; v2@2846.18,162.82 cw(c2856.26,152.74) 2856.26,167 ; v2@2846.18,171.18 ccw(c2875.57,200.57) 2875.57,159 ; v2@2846.18,171.18 ccw(c2875.57,200.57) 2875.57,159 ; v2@2846.18,171.18 ccw(c2856.26,181.26) 2856.26,167 ; v2@2846.18,171.18 ccw(c2875.57,200.57) 2875.57,159 ; v2@2846.18,171.18 ccw(c2875.57,200.57) 2875.57,159 ; v2@2846.18,171.18 ccw(c2856.26,181.26) 2856.26,167 ; v2@2846.18,186.82 cw(c2873.16,159.84) 2873.16,198 ; v2@2846.18,186.82 cw(c2873.16,159.84) 2873.16,198 ; v2@2846.18,186.82 cw(c2873.16,159.84) 2873.16,198 ; v2@2846.18,186.82 cw(c2873.16,159.84) 2873.16,198 ; v2@2846.18,195.18 ccw(c2887.64,236.64) 2887.64,178 cw(c2887.64,236.64) v2@2846.18,195.18 ; v2@2846.18,195.18 ccw(c2865.91,214.91) 2865.91,187 cw(c2865.91,214.91) v2@2846.18,195.18 ; v2@2849,159 v2@2849,197 ; v2@2849,159 2903,159 ; v2@2849,197 cw(c2813.59,197) 2837.94,171.29 ccw(c2813.59,197) v2@2849,197 ; 2892,198 2898,192 2920,170 2920,155 ; 2897,178 2920,155 ; 2920,132 2920,155 ; v2@2834,163.8 cw(c2861.65,163.8) 2845.46,186.21 ccw(c2861.65,163.8) v2@2834,163.8 ; v2@2837.82,171.18 cw(c2854.3,154.7) 2854.3,178 ccw(c2854.3,154.7) v2@2837.82,171.18
VB1: C19.2 U4.30 | length 532.9
  Top Layer w7.87: U4.30@2250.79,50 2274,50 2289,65 2381,65 2416.01,29.99 2441.01,29.99 2587,-116 2631,-116 2636.06,-110.94 ; C19.2@2636.06,-87.76 2636.06,-110.94 ; 2636.06,-110.94 ccw(c2626.66,-110.94) 2630.98,-102.58 cw(c2626.66,-110.94) 2636.06,-110.94 ; 2636.06,-110.94 cw(c2645.47,-110.94) 2641.15,-102.58 ccw(c2645.47,-110.94) 2636.06,-110.94
VB2: C16.2 U4.26 | length 800.5
  Top Layer w7.87: U4.26@2250.79,-12.99 2429.99,-12.99 2574,-157 2848,-157 2863,-142 C16.2@2863,-103.5 ; 2863,-119.46 ccw(c2836.29,-119.46) 2855.18,-100.58 cw(c2836.29,-119.46) 2863,-119.46 ; 2863,-119.46 cw(c2889.71,-119.46) 2870.82,-100.58 ccw(c2889.71,-119.46) 2863,-119.46
VB3: C8.2 U4.23 | length 1218.4
  Top Layer w7.87: U4.23@2250.79,-60.24 2419.24,-60.24 2558,-199 2993,-199 3081.87,-110.13 ; C8.2@3081.87,-87.76 3081.87,-110.13 ; 3081.87,-110.13 ccw(c3073.77,-110.13) 3077.2,-102.78 cw(c3073.77,-110.13) 3081.87,-110.13 ; 3081.87,-110.13 cw(c3089.98,-110.13) 3086.55,-102.78 ccw(c3089.98,-110.13) 3081.87,-110.13 ; 3050.71,-141.29 ccw(c3002.17,-92.76) 3070.81,-92.76 cw(c3002.17,-92.76) 3050.71,-141.29 ; 3064.15,-127.85 ccw(c3029.05,-92.76) 3078.69,-92.76 cw(c3029.05,-92.76) 3064.15,-127.85 ; 3077.59,-114.41 ccw(c3055.93,-92.76) 3086.56,-92.76 cw(c3055.93,-92.76) 3077.59,-114.41